# EAGLE board moth8_v1 (EAGLE 9.5.1)
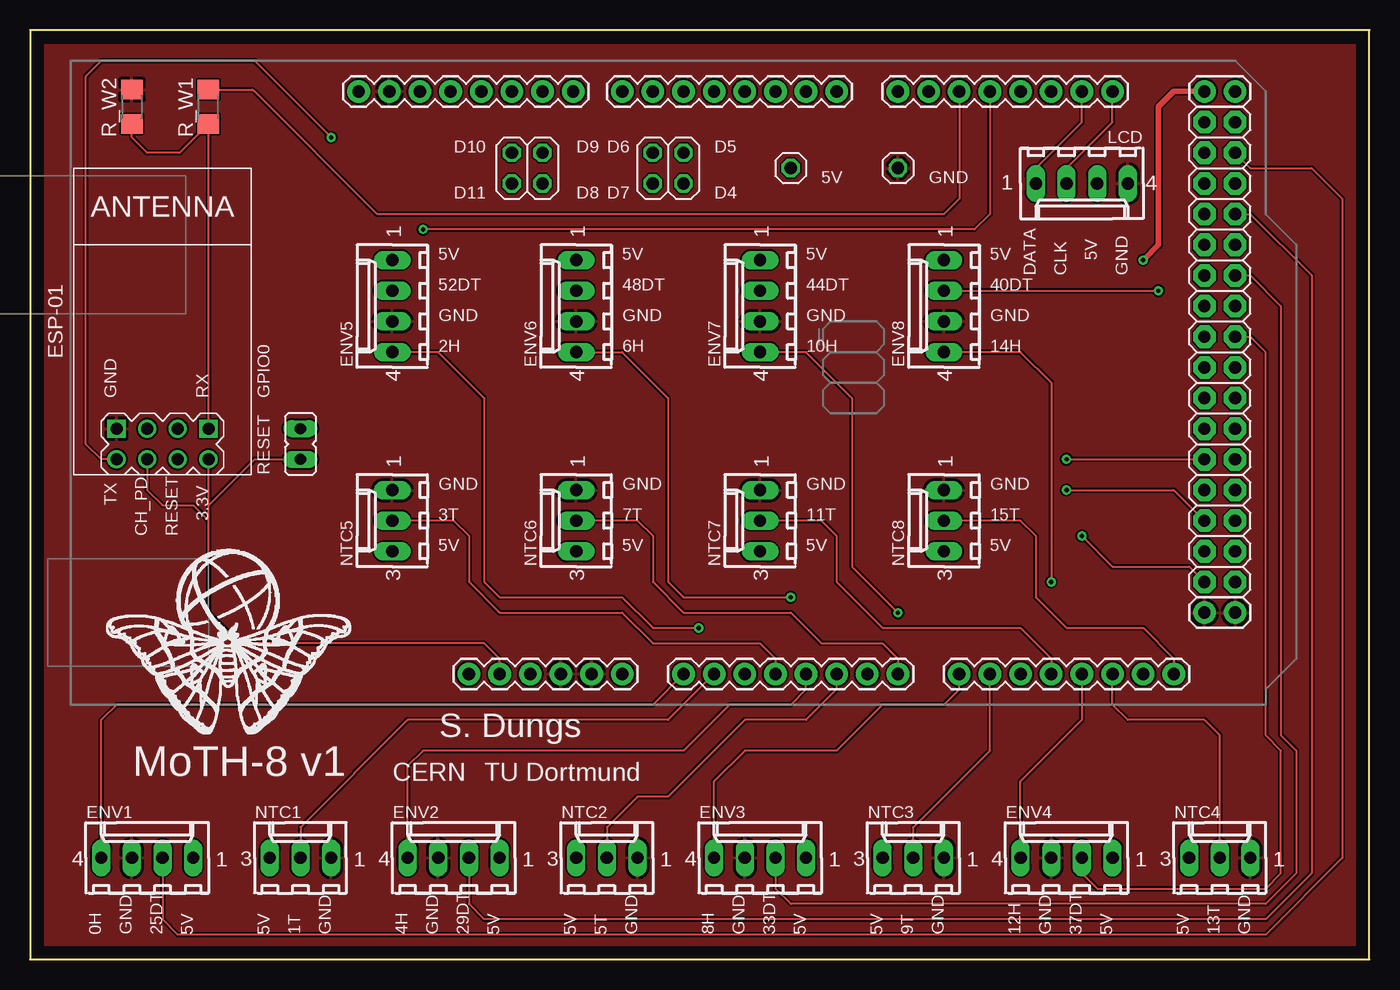
[diagram p0: board, top side]
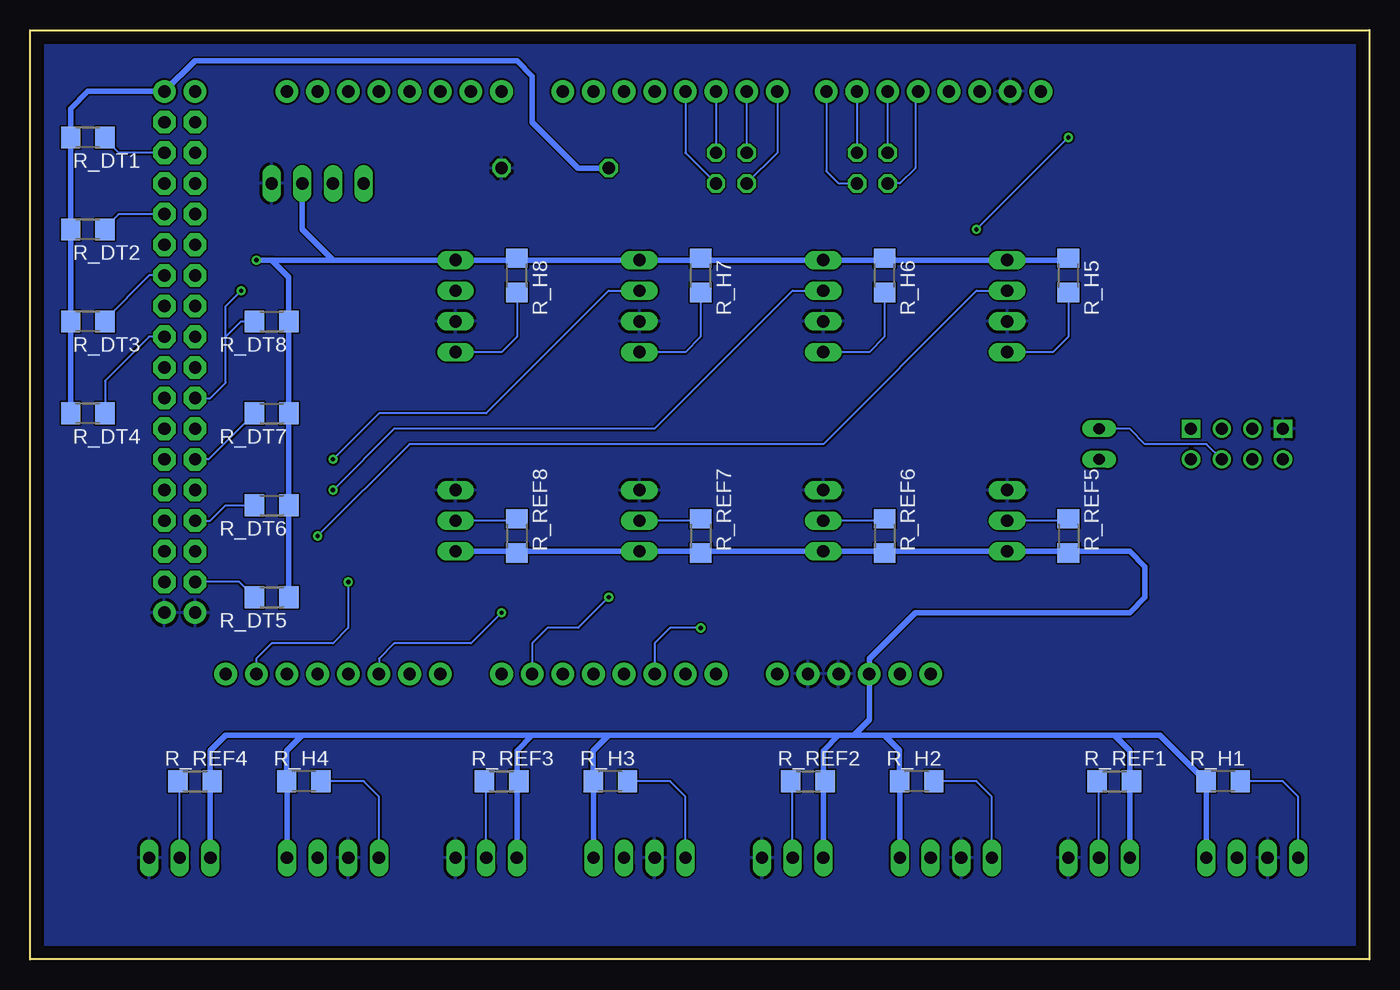
[diagram p1: board, bottom side, seen from below]

Size 111 x 77 mm. Coordinates in mm from the lower left corner, seen from the top.
Outline: 0,77 0,0 111,0 111,77 0,77
Copper layers (1*16): Top 0.035mm / dielectric 1.5mm / Bottom 0.035mm
Design rules "default": minimum track width 6mil, minimum drill 0.35mm, track to track 6mil, track to pad 6mil, pad to pad 6mil, via to via 6mil, smd to smd 6mil, copper to edge 40mil, drill to drill 6mil, minimum pad ring 10mil, minimum via ring 8mil, stop-mask expansion 4mil, vias tented up to drill 0mil, thermal gap 10mil

## Footprints (pad centres in the part's own frame; a part is rotated, then mirrored left to right if it is on the bottom)
ARDUINO_MEGA = drill 1.016 pad 1.88: 0 13.97,24.13; 1 11.43,24.13; 2 8.89,24.13; 3 6.35,24.13; 3.3V -13.97,-24.13; 4 3.81,24.13; 5 1.27,24.13; 5V@0 -11.43,-24.13; 5V@1 44.45,24.13; 5V@2 46.99,24.13; 6 -1.27,24.13; 7 -3.81,24.13; 8 -7.874,24.13; 9 -10.414,24.13; 10 -12.954,24.13; 11 -15.494,24.13; 12 -18.034,24.13; 13 -20.574,24.13; 14 19.05,24.13; 15 21.59,24.13; 16 24.13,24.13; 17 26.67,24.13; 18 29.21,24.13; 19 31.75,24.13; 20 34.29,24.13; 21 36.83,24.13; A0 1.27,-24.13; A1 3.81,-24.13; A2 6.35,-24.13; A3 8.89,-24.13; A4 11.43,-24.13; A5 13.97,-24.13; A6 16.51,-24.13; A7 19.05,-24.13; A8 24.13,-24.13; A9 26.67,-24.13; A10 29.21,-24.13; A11 31.75,-24.13; A12 34.29,-24.13; A13 36.83,-24.13; A14 39.37,-24.13; A15 41.91,-24.13; AREF -25.654,24.13; GND@0 -8.89,-24.13; GND@1 -6.35,-24.13; GND@2 44.45,-19.05; GND@3 46.99,-19.05; GND@4 -23.114,24.13; RESET -16.51,-24.13; VIN -3.81,-24.13 | drill 1.016 pad 1.88 octagon: 22 44.45,21.59; 23 46.99,21.59; 24 44.45,19.05; 25 46.99,19.05; 26 44.45,16.51; 27 46.99,16.51; 28 44.45,13.97; 29 46.99,13.97; 30 44.45,11.43; 31 46.99,11.43; 32 44.45,8.89; 33 46.99,8.89; 34 44.45,6.35; 35 46.99,6.35; 36 44.45,3.81; 37 46.99,3.81; 38 44.45,1.27; 39 46.99,1.27; 40 44.45,-1.27; 41 46.99,-1.27; 42 44.45,-3.81; 43 46.99,-3.81; 44 44.45,-6.35; 45 46.99,-6.35; 46 44.45,-8.89; 47 46.99,-8.89; 48 44.45,-11.43; 49 46.99,-11.43; 50 44.45,-13.97; 51 46.99,-13.97; 52 44.45,-16.51; 53 46.99,-16.51
2X02 = drill 1.016 octagon: 1 -1.27,-1.27; 2 -1.27,1.27; 3 1.27,-1.27; 4 1.27,1.27
6410-04 = drill 1.016 long: 1 3.81,0; 2 1.27,0; 3 -1.27,0; 4 -3.81,0
WIRELESS-WIFI-ESP-01 = drill 1 square: A1 -8.89,3.81; D1 -8.89,-3.81 | drill 1: A2 -11.43,3.81; B1 -8.89,1.27; B2 -11.43,1.27; C1 -8.89,-1.27; C2 -11.43,-1.27; D2 -11.43,-3.81
JP1 = drill 0.914 long: 1 0,-1.27; 2 0,1.27
1X01 = drill 1.016 octagon: 1 0,0
6410-03 = drill 1.016 long: 1 2.54,0; 2 0,0; 3 -2.54,0
R1206 = smd 1.6 x 1.803: 1 -1.422,0; 2 1.422,0

## Placement (x,y rotation side)
B1  ARDUINO_MEGA_R3FULL  [ARDUINO_MEGA]  52.88,47.79 0 top
DP1  [2X02]  41.2,65.57 0 top
DP2  [2X02]  52.88,65.57 0 top
ENV1  22-27-2041-04  [6410-04]  9.7,8.42 0 top
ENV2  22-27-2041-04  [6410-04]  35.1,8.42 0 top
ENV3  22-27-2041-04  [6410-04]  60.5,8.42 0 top
ENV4  22-27-2041-04  [6410-04]  85.9,8.42 0 top
ENV5  22-27-2041-04  [6410-04]  30.02,54.14 90 top
ENV6  22-27-2041-04  [6410-04]  45.26,54.14 90 top
ENV7  22-27-2041-04  [6410-04]  60.5,54.14 90 top
ENV8  22-27-2041-04  [6410-04]  75.74,54.14 90 top
ESP-01  WIRELESS-WIFI-ESP-01  [WIRELESS-WIFI-ESP-01]  10.97,52.87 90 top
JP1  [JP1]  22.4,42.71 0 top
JP2  [1X01]  63.04,65.57 0 top
JP3  [1X01]  71.93,65.57 0 top
LCD  22-27-2041-04  [6410-04]  87.17,64.3 180 top
NTC1  22-27-2031-03  [6410-03]  22.4,8.42 0 top
NTC2  22-27-2031-03  [6410-03]  47.8,8.42 0 top
NTC3  22-27-2031-03  [6410-03]  73.2,8.42 0 top
NTC4  22-27-2031-03  [6410-03]  98.6,8.42 0 top
NTC5  22-27-2031-03  [6410-03]  30.02,36.36 90 top
NTC6  22-27-2031-03  [6410-03]  45.26,36.36 90 top
NTC7  22-27-2031-03  [6410-03]  60.5,36.36 90 top
NTC8  22-27-2031-03  [6410-03]  75.74,36.36 90 top
R_DT1  [R1206]  106.22,68.11 0 bottom
R_DT2  [R1206]  106.22,60.49 0 bottom
R_DT3  [R1206]  106.22,52.87 0 bottom
R_DT4  [R1206]  106.22,45.25 0 bottom
R_DT5  [R1206]  90.98,30.01 180 bottom
R_DT6  [R1206]  90.98,37.63 180 bottom
R_DT7  [R1206]  90.98,45.25 180 bottom
R_DT8  [R1206]  90.98,52.87 180 bottom
R_H1  [R1206]  12.11,14.77 0 bottom
R_H2  [R1206]  37.51,14.77 0 bottom
R_H3  [R1206]  62.91,14.77 0 bottom
R_H4  [R1206]  88.31,14.77 0 bottom
R_H5  [R1206]  24.94,56.68 270 bottom
R_H6  [R1206]  40.18,56.68 270 bottom
R_H7  [R1206]  55.42,56.68 270 bottom
R_H8  [R1206]  70.66,56.68 270 bottom
R_REF1  [R1206]  21.13,14.77 180 bottom
R_REF2  [R1206]  46.53,14.77 180 bottom
R_REF3  [R1206]  71.93,14.77 180 bottom
R_REF4  [R1206]  97.33,14.77 180 bottom
R_REF5  [R1206]  24.94,35.09 90 bottom
R_REF6  [R1206]  40.18,35.09 90 bottom
R_REF7  [R1206]  55.42,35.09 90 bottom
R_REF8  [R1206]  70.66,35.09 90 bottom
R_W1  [R1206]  14.78,70.65 270 top
R_W2  [R1206]  8.43,70.65 90 top

## Library data of the parts
B1 = Arduino_Mega_Shield_v1
DP1 DP2 JP2 JP3 = pinhead
ENV1-ENV8 LCD NTC1-NTC8 = con-molex; MF: MOLEX; OC_FARNELL: unknown; OC_NEWARK: unknown
ESP-01 = diy-modules
JP1 = jumper
R_DT1-R_DT8 R_H1-R_H8 R_REF1-R_REF8 R_W1 R_W2 = rcl; SPICEPREFIX: R

## Nets
5V2: B1.5V@1 ENV5.1 ENV6.1 ENV7.1 ENV8.1 LCD.3 R_DT5.1 R_DT6.1 R_DT7.1 R_DT8.1 R_H5.1 R_H6.1 R_H7.1 R_H8.1
5V3: B1.5V@2 JP2.1 R_DT1.1 R_DT2.1 R_DT3.1 R_DT4.1
+3V3: B1.3.3V ESP-01.B2 ESP-01.D2 JP1.1
+5V: B1.5V@0 ENV1.1 ENV2.1 ENV3.1 ENV4.1 NTC1.3 NTC2.3 NTC3.3 NTC4.3 NTC5.3 NTC6.3 NTC7.3 NTC8.3 R_H1.1 R_H2.1 R_H3.1 R_H4.1 R_REF1.1 R_REF2.1 R_REF3.1 R_REF4.1 R_REF5.1 R_REF6.1 R_REF7.1 R_REF8.1
CLK: B1.21 LCD.2
DATA: B1.20 LCD.1
DIGI4: B1.4 DP2.3
DIGI5: B1.5 DP2.4
DIGI6: B1.6 DP2.2
DIGI7: B1.7 DP2.1
DIGI8: B1.8 DP1.3
DIGI9: B1.9 DP1.4
DIGI10: B1.10 DP1.2
DIGI11: B1.11 DP1.1
DT1: B1.25 ENV1.2 R_DT1.2
DT2: B1.29 ENV2.2 R_DT2.2
DT3: B1.33 ENV3.2 R_DT3.2
DT4: B1.37 ENV4.2 R_DT4.2
DT5: B1.52 ENV5.2 R_DT5.2
DT6: B1.48 ENV6.2 R_DT6.2
DT7: B1.44 ENV7.2 R_DT7.2
DT8: B1.40 ENV8.2 R_DT8.2
GND: B1.GND@0 B1.GND@1 B1.GND@2 B1.GND@3 B1.GND@4 ENV1.3 ENV2.3 ENV3.3 ENV4.3 ENV5.3 ENV6.3 ENV7.3 ENV8.3 ESP-01.A1 JP3.1 LCD.4 NTC1.1 NTC2.1 NTC3.1 NTC4.1 NTC5.1 NTC6.1 NTC7.1 NTC8.1 R_W2.2
H1: B1.A0 ENV1.4 R_H1.2
H2: B1.A4 ENV2.4 R_H2.2
H3: B1.A8 ENV3.4 R_H3.2
H4: B1.A12 ENV4.4 R_H4.2
H5: B1.A2 ENV5.4 R_H5.2
H6: B1.A6 ENV6.4 R_H6.2
H7: B1.A10 ENV7.4 R_H7.2
H8: B1.A14 ENV8.4 R_H8.2
N$1: ESP-01.D1 R_W1.2 R_W2.1
N$2: ESP-01.C2 JP1.2
RX: B1.17 ESP-01.A2
T1: B1.A1 NTC1.2 R_REF1.2
T2: B1.A5 NTC2.2 R_REF2.2
T3: B1.A9 NTC3.2 R_REF3.2
T4: B1.A13 NTC4.2 R_REF4.2
T5: B1.A3 NTC5.2 R_REF5.2
T6: B1.A7 NTC6.2 R_REF6.2
T7: B1.A11 NTC7.2 R_REF7.2
T8: B1.A15 NTC8.2 R_REF8.2
TX: B1.16 R_W1.1

## Tracks (layer width: path | path; a pad name or v marks a point on that pad's centre or on a via)
5V2  (via drill 0.35)
  Top 0.457: B1.5V@1 94.79,71.92 93.52,70.65 93.52,59.22 v92.25,57.95
  Bottom 0.152: 55.57,57.95 55.5,58.03 R_H7.1 | 40.26,58.03 R_H6.1 | R_H8.1 70.66,57.95
  Bottom 0.457: LCD.3 88.44,60.49 85.9,57.95 | 90.98,57.95 85.9,57.95 | R_DT5.1 R_DT6.1 R_DT7.1 R_DT8.1 89.56,56.53 90.98,57.95 | 55.5,58.03 55.42,57.95 ENV7.1 70.66,57.95 ENV8.1 85.9,57.95 | 55.57,57.95 R_H7.1 55.27,57.95 ENV6.1 40.26,57.95 40.18,58.03 40.26,58.03 | 90.98,57.95 v92.25,57.95 | R_H6.1 40.03,57.95 ENV5.1 25.09,57.95 R_H5.1
5V3
  Bottom 0.457: R_DT4.1 R_DT3.1 R_DT2.1 R_DT1.1 107.64,70.5 106.22,71.92 B1.5V@2 97.33,74.46 70.66,74.46 69.39,73.19 69.39,69.38 65.58,65.57 JP2.1
+3V3
  Top 0.152: B1.3.3V 38.91,24.93 37.64,26.2 17.32,26.2 14.78,28.74 14.78,36.36 | 14.78,36.36 14.78,37.63 | 14.78,37.63 ESP-01.D2 | ESP-01.B2 9.7,38.9 10.97,37.63 13.51,37.63 14.78,36.36 | JP1.1 18.59,41.44 14.78,37.63
+5V
  Bottom 0.152: 24.79,33.82 24.86,33.74 R_REF5.1 | 40.1,33.74 R_REF6.1 | 55.34,33.74 R_REF7.1 | R_REF8.1 70.74,33.74 70.81,33.82 | R_REF3.1 70.66,14.62
  Bottom 0.457: 40.18,18.58 42.72,18.58 | 42.72,18.58 43.99,18.58 | 43.99,18.58 63.04,18.58 | 63.04,18.58 69.39,18.58 | 69.39,18.58 88.44,18.58 | 88.44,18.58 94.79,18.58 96.06,17.31 96.06,14.77 | 24.79,33.82 19.86,33.82 18.59,32.55 18.59,30.01 19.86,28.74 37.64,28.74 41.45,24.93 B1.5V@0 41.45,19.85 42.72,18.58 | 21.13,18.58 17.34,18.58 R_H1.1 13.51,14.74 ENV1.1 | 21.13,18.58 40.18,18.58 | ENV2.1 38.91,14.74 R_H2.1 38.94,17.34 40.18,18.58 | ENV3.1 64.31,14.74 R_H3.1 64.33,17.28 63.04,18.58 | 88.44,18.58 89.73,17.28 R_H4.1 89.71,14.74 ENV4.1 | NTC1.3 19.86,14.77 R_REF1.1 19.86,14.92 19.86,17.31 21.13,18.58 | NTC2.3 45.26,14.92 | 45.26,14.92 45.26,17.31 43.99,18.58 | R_REF2.1 45.26,14.92 | 70.66,14.62 NTC3.3 | 69.39,18.58 70.66,17.31 70.66,14.92 R_REF3.1 | NTC4.3 96.06,14.77 | R_REF4.1 96.06,14.77 | 24.86,33.74 24.94,33.82 NTC5.3 40.03,33.82 40.1,33.74 | R_REF6.1 40.33,33.82 NTC6.3 55.27,33.82 55.34,33.74 | R_REF7.1 55.57,33.82 NTC7.3 70.66,33.82 70.74,33.74 | R_REF8.1 70.81,33.82 NTC8.3
CLK
  Top 0.152: LCD.2 85.9,65.57 89.71,69.38 B1.21
DATA
  Top 0.152: LCD.1 83.36,65.57 87.17,69.38 B1.20
DIGI4
  Bottom 0.152: B1.4 56.69,66.84 DP2.3
DIGI5
  Bottom 0.152: B1.5 DP2.4
DIGI6
  Bottom 0.152: B1.6 DP2.2
DIGI7
  Bottom 0.152: B1.7 49.07,66.84 DP2.1
DIGI8
  Bottom 0.152: B1.8 45.01,65.32 43.99,64.3 DP1.3
DIGI9
  Bottom 0.152: B1.9 DP1.4
DIGI10
  Bottom 0.152: B1.10 DP1.2
DIGI11
  Bottom 0.152: B1.11 37.64,71.67 37.64,65.57 38.91,64.3 DP1.1
DT1
  Top 0.152: B1.25 101.14,65.57 106.22,65.57 108.76,63.03 108.76,8.42 102.41,2.07 12.24,2.07 10.97,3.34 ENV1.2
  Bottom 0.152: R_DT1.2 104.8,67.96 103.68,66.84 B1.25
DT2
  Top 0.152: B1.29 101.14,61.76 106.22,56.68 106.22,7.15 102.41,3.34 37.64,3.34 36.37,4.61 ENV2.2
  Bottom 0.152: R_DT2.2 104.8,60.64 103.68,61.76 B1.29
DT3
  Top 0.152: B1.33 101.14,56.68 103.68,54.14 103.68,18.58 104.95,17.31 104.95,7.15 102.41,4.61 63.04,4.61 61.77,5.88 ENV3.2
  Bottom 0.152: B1.33 101.14,56.68 104.8,53.02 R_DT3.2
DT4
  Top 0.152: B1.37 101.14,51.6 102.41,50.33 102.41,18.58 103.68,17.31 103.68,7.15 102.41,5.88 88.44,5.88 87.17,7.15 ENV4.2
  Bottom 0.152: B1.37 101.14,51.6 104.8,47.94 R_DT4.2
DT5  (via drill 0.35)
  Top 0.152: B1.52 96.06,32.55 89.71,32.55 v87.17,35.09
  Bottom 0.152: R_DT5.2 93.67,31.28 B1.52 | v87.17,35.09 79.55,42.71 45.26,42.71 32.56,55.41 ENV5.2
DT6  (via drill 0.35)
  Top 0.152: B1.48 94.79,38.9 v85.9,38.9
  Bottom 0.152: B1.48 96.06,36.36 94.79,37.63 R_DT6.2 | v85.9,38.9 80.82,43.98 59.23,43.98 47.8,55.41 ENV6.2
DT7  (via drill 0.35)
  Top 0.152: v85.9,41.44 B1.44
  Bottom 0.152: R_DT7.2 96.21,41.44 B1.44 | v85.9,41.44 82.09,45.25 73.2,45.25 63.04,55.41 ENV7.2
DT8  (via drill 0.35)
  Top 0.152: ENV8.2 v93.52,55.41
  Bottom 0.152: B1.40 96.06,46.52 94.79,47.79 94.79,51.6 | 94.79,51.6 93.52,52.87 R_DT8.2 | 94.79,51.6 94.79,54.14 v93.52,55.41
GND
  pour Top: 1,76 110,76 110,1 1,1
  pour Bottom: 1,76 1,1 110,1 110,76
H1
  Top 0.152: B1.A0 51.61,21.12 7.16,21.12 5.89,19.85 ENV1.4
  Bottom 0.152: ENV1.4 5.89,13.5 7.16,14.77 R_H1.2
H2
  Top 0.152: B1.A4 64.31,22.39 63.04,21.12 57.96,21.12 54.15,17.31 45.26,17.31 32.56,17.31 31.29,16.04 ENV2.4
  Bottom 0.152: ENV2.4 31.29,13.5 32.56,14.77 R_H2.2
H3
  Top 0.152: B1.A8 77.01,22.39 75.74,21.12 70.66,21.12 66.85,17.31 59.23,17.31 56.69,14.77 ENV3.4
  Bottom 0.152: ENV3.4 56.69,13.5 57.96,14.77 R_H3.2
H4
  Top 0.152: B1.A12 87.17,19.85 82.09,14.77 ENV4.4
  Bottom 0.152: ENV4.4 82.09,13.5 83.36,14.77 R_H4.2
H5  (via drill 0.35)
  Top 0.152: v55.42,27.47 51.61,27.47 49.07,30.01 38.91,30.01 37.64,31.28 37.64,46.52 33.83,50.33 ENV5.4
  Bottom 0.152: R_H5.2 24.94,51.6 26.21,50.33 ENV5.4 | v55.42,27.47 57.96,27.47 59.23,26.2 B1.A2
H6  (via drill 0.35)
  Top 0.152: v63.04,30.01 54.15,30.01 52.88,31.28 52.88,46.52 49.07,50.33 ENV6.4
  Bottom 0.152: R_H6.2 40.18,51.6 41.45,50.33 ENV6.4 | v63.04,30.01 65.58,27.47 68.12,27.47 69.39,26.2 B1.A6
H7  (via drill 0.35)
  Top 0.152: v71.93,28.74 68.12,32.55 68.12,46.52 64.31,50.33 ENV7.4
  Bottom 0.152: R_H7.2 55.42,51.6 56.69,50.33 ENV7.4 | v71.93,28.74 74.47,26.2 80.82,26.2 82.09,24.93 B1.A10
H8  (via drill 0.35)
  Top 0.152: v84.63,31.28 84.63,47.79 82.09,50.33 ENV8.4
  Bottom 0.152: R_H8.2 70.66,51.6 71.93,50.33 ENV8.4 | v84.63,31.28 84.63,27.47 85.9,26.2 90.98,26.2 92.25,24.93 B1.A14
N$1
  Top 0.152: ESP-01.D1 R_W1.2 12.39,66.84 9.7,66.84 8.43,68.11 R_W2.1
N$2
  Bottom 0.152: ESP-01.C2 13.51,42.71 18.59,42.71 19.86,43.98 JP1.2
RX  (via drill 0.35)
  Top 0.152: ESP-01.A2 5.89,41.44 4.62,42.71 4.62,73.19 5.89,74.46 18.59,74.46 v24.94,68.11 | B1.17 79.55,61.76 78.28,60.49 v32.56,60.49
  Bottom 0.152: v32.56,60.49 v24.94,68.11
T1
  Top 0.152: B1.A1 52.88,19.85 31.29,19.85 22.4,10.96 NTC1.2
  Bottom 0.152: NTC1.2 22.4,14.62 R_REF1.2
T2
  Top 0.152: B1.A5 66.85,22.39 64.31,19.85 59.23,19.85 52.88,13.5 50.34,13.5 47.8,10.96 NTC2.2
  Bottom 0.152: NTC2.2 47.8,14.62 R_REF2.2
T3
  Top 0.152: NTC3.2 73.2,10.96 79.55,17.31 B1.A9
  Bottom 0.152: NTC3.2 73.2,14.62 R_REF3.2
T4
  Top 0.152: B1.A13 89.71,21.12 90.98,19.85 97.33,19.85 98.6,18.58 NTC4.2
  Bottom 0.152: NTC4.2 98.6,14.62 R_REF4.2
T5
  Top 0.152: B1.A3 61.77,24.93 60.5,26.2 51.61,26.2 49.07,28.74 38.91,28.74 36.37,31.28 36.37,35.09 35.1,36.36 NTC5.2
  Bottom 0.152: R_REF5.2 25.09,36.36 NTC5.2
T6
  Top 0.152: B1.A7 71.93,24.93 70.66,26.2 65.58,26.2 63.04,28.74 54.15,28.74 51.61,31.28 51.61,35.09 50.34,36.36 NTC6.2
  Bottom 0.152: R_REF6.2 40.33,36.36 NTC6.2
T7
  Top 0.152: B1.A11 84.63,24.93 82.09,27.47 70.66,27.47 66.85,31.28 66.85,35.09 65.58,36.36 NTC7.2
  Bottom 0.152: R_REF7.2 55.57,36.36 NTC7.2
T8
  Top 0.152: B1.A15 94.79,24.93 92.25,27.47 85.9,27.47 83.36,30.01 83.36,35.09 82.09,36.36 NTC8.2
  Bottom 0.152: R_REF8.2 70.81,36.36 NTC8.2
TX
  Top 0.152: B1.16 77.01,63.03 75.74,61.76 28.75,61.76 18.59,71.92 18.44,72.07 R_W1.1

## Text on the board
tPlace: D10 | D9 | D6 | D5 | 5V | GND | D11 | D8 | D7 | D4 | 5V | 5V | 5V | 5V | 5V | DATA | CLK | GND | 52DT | 48DT | 44DT | 40DT | GND | GND | GND | GND | 2H | 6H | 10H | 14H | GND | RX | GPIO0 | RESET | GND | GND | GND | GND | TX | 3.3V | 3T | 7T | 11T | 15T | CH_PD | RESET | 5V | 5V | 5V | 5V | CERN | TU Dortmund | 0H | GND | 25DT | 5V | 5V | 1T | GND | 4H | GND | 29DT | 5V | 5V | 5T | GND | 8H | GND | 33DT | 5V | 5V | 9T | GND | 12H | GND | 37DT | 5V | 5V | 13T | GND
tNames: S. Dungs | MoTH-8 v1